# Altium PCB 核心板.PcbDoc (part 2 of 2)
Units mm, origin at the board's own origin, x right, y up, seen from the top; angles counter-clockwise.
Board outline 30 x 30 mm, 4 copper layers (Top Layer, Mid-Layer 1, Internal Plane 2, Bottom Layer); 39 components, 95 nets, 264 pads, 53 vias.
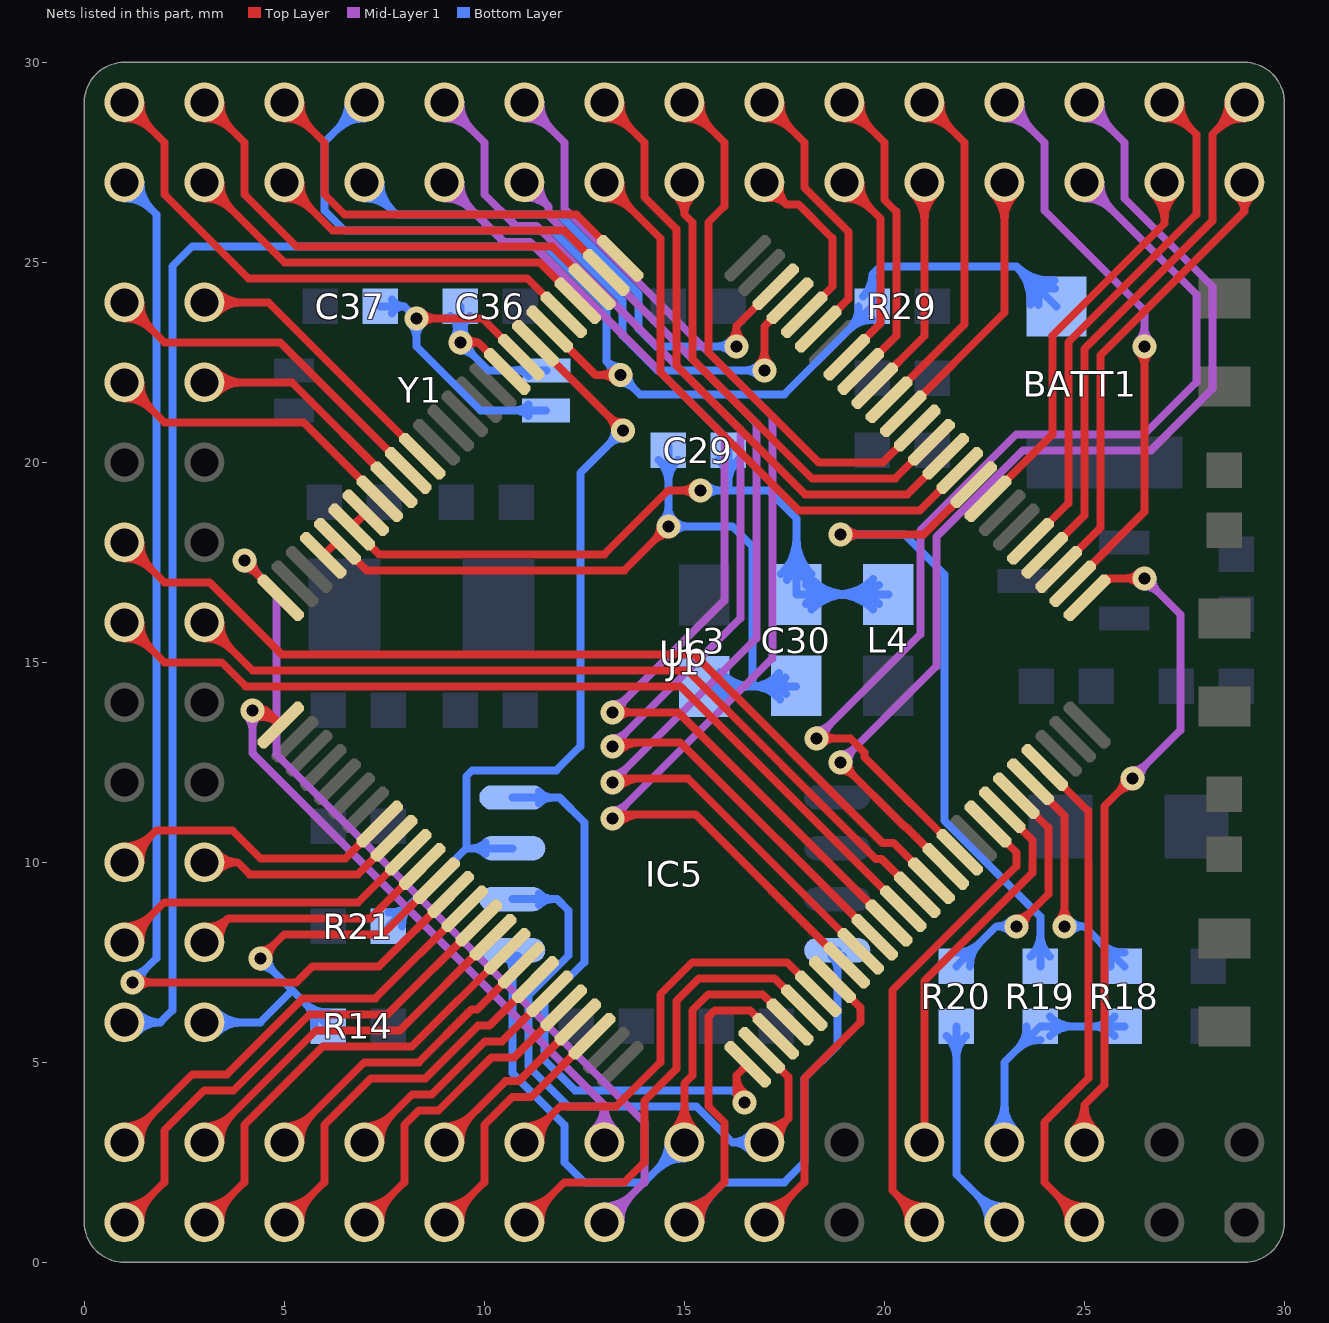
[diagram p4: the nets of this part, all layers, seen from the top]

## Via types
v1: diameter 0.6, hole 0.3, Top Layer to Bottom Layer, tented both sides, 53 vias

## Nets (pads, with @x,y where several pads share a name; then routed paths per layer and width w, separated by ;. In a path a pad name is that pad's centre, name@x,y a point inside that pad or via, vN(x,y) a via of type N, cw(c..) or ccw(c..) an arc to the next point about the centre after c; other vN are vias at no path point) (continued)
PA11: R20.1 U6.70 | length 8.6
  Top Layer w0.2: U6.70@23.299,11.665 24.1,10.864 24.1,9.2 23.4,8.5 v1@23.4,8.4 ; v1@23.3,8.6 ccw(c23.3,9.083) 23.641,8.741 ccw(c23.983,8.4) v1@23.5,8.4
  Bottom Layer w0.2: R20.1@21.8,7.4 22.8,8.4 v1(23.3,8.4) ; R20.1@21.8,7.74 ccw(c21.8,8.561) 22.38,7.98 ccw(c22.961,7.4) R20.1@22.14,7.4 ; v1@23.159,8.259 ccw(c22.817,7.917) 22.817,8.4 ccw(c22.817,8.883) v1@23.159,8.541
PA12: R18.2 U6.71 | length 8.7
  Top Layer w0.2: U6.71@23.653,12.019 24.5,11.172 v1(24.5,8.4) ; v1@24.359,8.541 ccw(c24.017,8.883) 24.5,8.883 ccw(c24.983,8.883) v1@24.641,8.541
  Bottom Layer w0.2: v1(24.5,8.4) 25,8.4 R18.2@26,7.4 ; v1@24.641,8.259 cw(c24.983,7.917) 24.983,8.4 cw(c24.983,8.883) v1@24.641,8.541 ; R18.2@25.66,7.4 ccw(c24.839,7.4) 25.42,7.98 ccw(c26,8.561) R18.2@26,7.74
PA15: J1.74 U6.77 | length 17.3
  Top Layer w0.2: U6.77@24.714,16.968 26.5,18.755 v1(26.5,22.9) ; v1@26.359,22.759 cw(c26.017,22.417) 26.5,22.417 cw(c26.983,22.417) v1@26.641,22.759
  Mid-Layer 1 w0.2: J1.74@23,28.6 cw(c23,27.634) 23.683,28.317 cw(c24.366,29) J1.74@23.4,29 ; J1.74@23,29 24,28 24,26.3 26.5,23.8 v1(26.5,22.9) ; v1@26.359,23.041 ccw(c26.017,23.383) 26.5,23.383 ccw(c26.983,23.383) v1@26.641,23.041
PB0: J1.34 U6.35 | length 9.5
  Top Layer w0.2: J1.34@1,8 2,9 6.846,9 U6.35@8.097,10.251 ; J1.34@1,8.4 ccw(c1,9.366) 1.683,8.683 ccw(c2.366,8) J1.34@1.4,8
PB1: J1.33 U6.36 | length 7.5
  Top Layer w0.2: J1.33@3,8 3.6,8.6 ; J1.33@3.038,8.398 ccw(c3.105,9.095) 3.6,8.6 ; J1.33@3.398,8.038 cw(c4.095,8.105) 3.6,8.6 ; U6.36@8.45,9.897 7.153,8.6 3.6,8.6
PB2: J1.31 R14.2 U6.37 | length 14.5
  Top Layer w0.2: v1(4.4,7.6) 5,8.2 7.46,8.2 U6.37@8.804,9.544 ; v1@4.4,7.8 ccw(c4.4,8.283) 4.741,7.941 ccw(c5.083,7.6) v1@4.6,7.6
  Bottom Layer w0.2: J1.31@3,6 4.4,6 5.2,6.8 ; J1.31@3.283,5.717 cw(c3.966,5.034) 3.966,6 cw(c3.966,6.966) J1.31@3.283,6.283 ; v1@4.4,7.4 cw(c4.4,6.917) 4.741,7.259 cw(c5.083,7.6) v1@4.6,7.6 ; v1(4.4,7.6) 5.2,6.8 ; R14.2@5.76,5.9 ccw(c4.939,5.9) 5.52,6.48 ccw(c6.1,7.061) R14.2@6.1,6.24 ; R14.2@6.1,5.9 5.2,6.8
PB3: J1.73 U6.89 | length 8.4
  Top Layer w0.2: U6.89@20.471,21.211 23,23.74 J1.73@23,27 ; J1.73@22.717,26.717 cw(c22.034,26.034) 23,26.034 cw(c23.966,26.034) J1.73@23.283,26.717
PB4: J1.72 U6.90 | length 10.1
  Top Layer w0.2: U6.90@20.118,21.564 22,23.447 22,28 J1.72@21,29 ; J1.72@21,28.6 cw(c21,27.634) 21.683,28.317 cw(c22.366,29) J1.72@21.4,29
PB5: J1.71 U6.91 | length 7.1
  Top Layer w0.2: U6.91@19.764,21.918 21,23.154 J1.71@21,27 ; J1.71@20.717,26.717 cw(c20.034,26.034) 21,26.034 cw(c21.966,26.034) J1.71@21.283,26.717
PB6: J1.70 U6.92 | length 9.2
  Top Layer w0.2: J1.70@19,28.6 cw(c19,27.634) 19.683,28.317 cw(c20.366,29) J1.70@19.4,29 ; J1.70@19,29 20,28 20,26.566 20.3,26.266 20.3,23.161 U6.92@19.41,22.272
PB7: J1.69 U6.93 | length 6.6
  Top Layer w0.2: J1.69@19,26.6 cw(c19,25.634) 19.683,26.317 cw(c20.366,27) J1.69@19.4,27 ; J1.69@19,27 19.9,26.1 19.9,23.468 U6.93@19.057,22.625
PB8: J1.68 U6.95 | length 8.4
  Top Layer w0.2: J1.68@17,28.6 cw(c17,27.634) 17.683,28.317 cw(c18.366,29) J1.68@17.4,29 ; J1.68@17,29 18,28 18,26.869 19.1,25.769 19.1,24.082 U6.95@18.35,23.332
PB9: J1.67 U6.96 | length 5.5
  Top Layer w0.2: J1.67@17,27 17.549,26.451 17.851,26.451 18.7,25.603 18.7,24.39 U6.96@17.996,23.686 ; J1.67@17.066,26.606 cw(c17.158,26.061) 17.549,26.451 cw(c17.939,26.842) J1.67@17.394,26.934
PB10: J1.22 U6.47 | length 6.1
  Top Layer w0.2: J1.22@9,3 10.534,4.534 10.866,4.534 U6.47@12.339,6.008 ; J1.22@9,3.4 ccw(c9,4.366) 9.683,3.683 ccw(c10.366,3) J1.22@9.4,3
PB11: J1.21 U6.48 | length 8
  Top Layer w0.2: J1.21@9,1 10,2 10,3.434 10.7,4.134 11.173,4.134 U6.48@12.693,5.655 ; J1.21@9,1.4 ccw(c9,2.366) 9.683,1.683 ccw(c10.366,1) J1.21@9.4,1
PC0: J1.49 U6.15 | length 8.6
  Top Layer w0.2: J1.49@3,24 4.601,24 U6.15@8.45,20.15 ; J1.49@3.283,23.717 cw(c3.966,23.034) 3.966,24 cw(c3.966,24.966) J1.49@3.283,24.283
PC1: J1.50 U6.16 | length 10.4
  Top Layer w0.2: J1.50@1,23.6 cw(c1,22.634) 1.683,23.317 cw(c2.366,24) J1.50@1.4,24 ; J1.50@1,24 2,23 4.893,23 U6.16@8.097,19.797
PC2: J1.47 U6.17 | length 7.3
  Top Layer w0.2: J1.47@3,22 5.186,22 U6.17@7.743,19.443 ; J1.47@3.283,21.717 cw(c3.966,21.034) 3.966,22 cw(c3.966,22.966) J1.47@3.283,22.283
PC3: J1.48 U6.18 | length 9.1
  Top Layer w0.2: J1.48@1,21.6 cw(c1,20.634) 1.683,21.317 cw(c2.366,22) J1.48@1.4,22 ; J1.48@1,22 2,21 5.479,21 U6.18@7.39,19.09
PC4: J1.36 U6.33 | length 8.9
  Top Layer w0.2: J1.36@1,10 1.8,10.8 3.7,10.8 4.4,10.1 6.532,10.1 U6.33@7.39,10.958 ; J1.36@1,10.4 ccw(c1,11.366) 1.683,10.683 ccw(c2.366,10) J1.36@1.4,10
PC5: J1.35 U6.34 | length 6.4
  Top Layer w0.2: J1.35@3,10 3.834,10 ; J1.35@3.312,9.75 cw(c3.834,9.33) 3.834,10 ; J1.35@3.312,10.25 ccw(c3.834,10.67) 3.834,10 ; U6.34@7.743,10.604 6.839,9.7 4.134,9.7 3.834,10
PC6: J1.41 U6.63 | length 22.2
  Top Layer w0.2: J1.41@3,15.6 cw(c3,14.634) 3.683,15.317 cw(c4.366,16) J1.41@3.4,16 ; J1.41@3,16 4.2,14.8 15.073,14.8 19.787,10.087 19.928,10.087 U6.63@20.825,9.19
PC7: J1.44 U6.64 | length 25.2
  Top Layer w0.2: J1.44@1,17.6 cw(c1,16.634) 1.683,17.317 cw(c2.366,18) J1.44@1.4,18 ; J1.44@1,18 2,17 3.131,17 4.931,15.2 15.239,15.2 19.952,10.487 20.235,10.487 U6.64@21.178,9.544
PC8: J1.76 U6.65 | length 30.3
  Top Layer w0.2: v1@18.9,12.3 cw(c18.9,11.817) 19.241,12.159 cw(c19.583,12.5) v1@19.1,12.5 ; v1(18.9,12.5) 20.513,10.887 20.542,10.887 U6.65@21.532,9.897
  Mid-Layer 1 w0.2: v1(18.9,12.5) 21.3,14.9 21.3,18.134 23.466,20.3 26.666,20.3 28.2,21.834 28.2,24.4 26,26.6 26,28 J1.76@25,29 ; v1@18.9,12.7 ccw(c18.9,13.183) 19.241,12.841 ccw(c19.583,12.5) v1@19.1,12.5 ; J1.76@25,28.6 cw(c25,27.634) 25.683,28.317 cw(c26.366,29) J1.76@25.4,29
PC9: J1.75 U6.66 | length 28.7
  Top Layer w0.2: v1(18.3,13.1) 19.148,13.1 19.5,12.749 19.5,12.636 U6.66@21.885,10.251 ; v1@18.441,12.959 cw(c18.783,12.617) 18.783,13.1 cw(c18.783,13.583) v1@18.441,13.241
  Mid-Layer 1 w0.2: v1(18.3,13.1) 20.9,15.7 20.9,18.3 23.3,20.7 26.5,20.7 27.8,22 27.8,24.2 J1.75@25,27 ; v1@18.3,13.3 ccw(c18.3,13.783) 18.641,13.441 ccw(c18.983,13.1) v1@18.5,13.1 ; J1.75@25,26.6 cw(c25,25.634) 25.683,26.317 cw(c26.366,27) J1.75@25.4,27
PC10: J1.79 U6.78 | length 12.5
  Top Layer w0.2: U6.78@24.36,17.322 25.4,18.362 25.4,22.669 29,26.269 ; J1.79@28.784,26.663 cw(c28.531,26.269) 29,26.269 ; J1.79@29,27 29,26.269 ; J1.79@29.216,26.663 ccw(c29.469,26.269) 29,26.269
PC11: J1.80 U6.79 | length 14.9
  Top Layer w0.2: U6.79@24.007,17.675 25,18.669 25,22.834 28.2,26.034 28.2,28.2 J1.80@29,29 ; J1.80@28.6,29 cw(c27.634,29) 28.317,28.317 cw(c29,27.634) J1.80@29,28.6
PC12: J1.78 U6.80 | length 14.5
  Top Layer w0.2: U6.80@23.653,18.029 24.6,18.976 24.6,23 27.8,26.2 27.8,28.2 J1.78@27,29 ; J1.78@27,28.6 cw(c27,27.634) 27.683,28.317 cw(c28.366,29) J1.78@27.4,29
PC14: C37.2 U6.8 Y1.2 | length 11.7
  Top Layer w0.2: v1(8.3,23.6) 9.95,23.6 U6.8@10.925,22.625 ; v1@8.441,23.459 cw(c8.783,23.117) 8.783,23.6 cw(c8.783,24.083) v1@8.441,23.741
  Bottom Layer w0.2: C37.2@7.4,23.9 8,23.9 ; C37.2@7.692,23.725 cw(c8,23.541) 8,23.9 ; C37.2@7.692,24.075 ccw(c8,24.259) 8,23.9 ; v1@8.159,23.459 cw(c7.817,23.117) 8.3,23.117 cw(c8.783,23.117) v1@8.441,23.459 ; Y1.2@11.102,21.158 ccw(c10.76,20.817) 10.76,21.3 ccw(c10.76,21.782) Y1.2@11.102,21.441 ; Y1.2@11.543,21.3 9.9,21.3 8.3,22.9 v1(8.3,23.6) 8,23.9
PC15: C36.2 U6.9 Y1.1 | length 10.4
  Top Layer w0.2: v1(9.4,23) 9.843,23 ; v1@9.55,22.868 cw(c9.843,22.609) 9.843,23 ; v1@9.55,23.132 ccw(c9.843,23.391) 9.843,23 ; U6.9@10.572,22.272 9.843,23
  Bottom Layer w0.2: C36.2@9.16,23.66 cw(c8.579,23.079) 9.4,23.079 cw(c10.221,23.079) C36.2@9.64,23.66 ; v1@9.238,23.117 ccw(c8.911,23.351) 9.299,23.455 ; v1@9.259,23.141 ccw(c8.917,23.483) 9.4,23.483 ccw(c9.883,23.483) v1@9.541,23.141 ; v1@9.3,23.173 ccw(c9.094,23.531) 9.492,23.424 ; 9.308,23.424 ccw(c9.706,23.531) v1@9.5,23.173 ; v1@9.4,22.8 cw(c9.4,22.317) 9.741,22.659 cw(c10.083,23) v1@9.6,23 ; C36.2@9.4,23.9 v1(9.4,23) 10.1,22.301 Y1.1@11.553,22.301 ; 9.501,23.455 ccw(c9.889,23.351) v1@9.563,23.117 ; Y1.1@11.112,22.159 ccw(c10.77,21.818) 10.77,22.301 ccw(c10.77,22.783) Y1.1@11.112,22.442
PD2: J1.77 U6.83 | length 11.3
  Top Layer w0.2: U6.83@22.592,19.09 24.2,20.697 24.2,23.166 27,25.966 J1.77@27,27 ; J1.77@26.717,26.717 cw(c26.034,26.034) 27,26.034 cw(c27.966,26.034) J1.77@27.283,26.717
PD4: J1.63 U6.85 | length 16.2
  Top Layer w0.2: J1.63@13,26.6 cw(c13,25.634) 13.683,26.317 cw(c14.366,27) J1.63@13.4,27 ; J1.63@13,27 14.4,25.6 14.4,22.254 17.854,18.8 20.889,18.8 U6.85@21.885,19.797
PD5: J1.64 U6.86 | length 17.3
  Top Layer w0.2: J1.64@13,28.6 cw(c13,27.634) 13.683,28.317 cw(c14.366,29) J1.64@13.4,29 ; J1.64@13,29 14,28 14,26.634 14.8,25.834 14.8,22.42 18.02,19.2 20.581,19.2 U6.86@21.532,20.15
PD6: J1.65 U6.87 | length 13.2
  Top Layer w0.2: J1.65@14.76,26.68 cw(c14.4,26.2) 15,26.2 ; J1.65@15,27 15,26.2 ; J1.65@15.24,26.68 ccw(c15.6,26.2) 15,26.2 ; U6.87@21.178,20.504 20.274,19.6 18.186,19.6 15.2,22.586 15.2,26 15,26.2
PD7: J1.66 U6.88 | length 15.1
  Top Layer w0.2: J1.66@15,28.6 cw(c15,27.634) 15.683,28.317 cw(c16.366,29) J1.66@15.4,29 ; J1.66@15,29 16,28 16,26.4 15.6,26 15.6,22.751 18.351,20 19.967,20 U6.88@20.825,20.857
PD10: J1.13 U6.57 | length 8.9
  Top Layer w0.2: J1.13@17,1 18,2 18,4.6 19.4,6 19.4,6.372 U6.57@18.703,7.069 ; J1.13@17,1.4 ccw(c17,2.366) 17.683,1.683 ccw(c18.366,1) J1.13@17.4,1
PD11: J1.62 U6.58 | length 32.5
  Top Layer w0.2: v1@13.2,11.2 15.279,11.2 U6.58@19.057,7.422 ; v1@13.341,10.959 cw(c13.924,10.376) 13.924,11.2
  Mid-Layer 1 w0.2: J1.62@11,28.6 cw(c11,27.634) 11.683,28.317 cw(c12.366,29) J1.62@11.4,29 ; J1.62@11,29 12,28 12,26.351 17.2,21.151 17.2,15.1 v1(13.2,11.1) ; v1@13.2,11.3 ccw(c13.2,11.783) 13.541,11.441 ccw(c13.883,11.1) v1@13.4,11.1
PD12: J1.61 U6.59 | length 29.5
  Top Layer w0.2: v1@13.2,12.1 15.086,12.1 U6.59@19.41,7.776 ; v1@13.341,11.859 cw(c13.924,11.276) 13.924,12.1
  Mid-Layer 1 w0.2: J1.61@11,27 11.6,26.4 ; J1.61@11.038,26.602 cw(c11.105,25.905) 11.6,26.4 ; J1.61@11.398,26.962 ccw(c12.095,26.895) 11.6,26.4 ; v1(13.2,12) 16.8,15.6 16.8,20.986 11.6,26.186 11.6,26.4 ; v1@13.2,12.2 ccw(c13.2,12.683) 13.541,12.341 ccw(c13.883,12) v1@13.4,12
PD13: J1.60 U6.60 | length 32.3
  Top Layer w0.2: v1@13.2,12.997 14.896,12.997 U6.60@19.764,8.129 ; v1@13.341,12.759 cw(c13.917,12.183) 13.917,12.997
  Mid-Layer 1 w0.2: J1.60@9,28.6 cw(c9,27.634) 9.683,28.317 cw(c10.366,29) J1.60@9.4,29 ; J1.60@9,29 10,28 10,26.7 10.79,25.91 11.31,25.91 16.4,20.82 16.4,16.1 v1(13.2,12.9) ; v1@13.2,13.1 ccw(c13.2,13.583) 13.541,13.241 ccw(c13.883,12.9) v1@13.4,12.9
PD14: J1.59 U6.61 | length 29.8
  Top Layer w0.2: v1(13.2,13.749) 14.852,13.749 U6.61@20.118,8.483 ; v1@13.341,13.607 cw(c13.683,13.266) 13.683,13.749 cw(c13.683,14.231) v1@13.341,13.89
  Mid-Layer 1 w0.2: J1.59@9,26.6 cw(c9,25.634) 9.683,26.317 cw(c10.366,27) J1.59@9.4,27 ; J1.59@9,27 10.49,25.51 11.144,25.51 16,20.654 16,16.549 v1(13.2,13.749) ; v1@13.2,13.949 ccw(c13.2,14.431) 13.541,14.09 ccw(c13.883,13.749) v1@13.4,13.749
PD15: J1.42 U6.62 | length 24
  Top Layer w0.2: J1.42@1,15.6 cw(c1,14.634) 1.683,15.317 cw(c2.366,16) J1.42@1.4,16 ; J1.42@1,16 2,15 3.434,15 4.034,14.4 14.908,14.4 U6.62@20.471,8.837
PE0: J1.58 U6.97 | length 21.3
  Top Layer w0.2: v1@16.859,22.441 ccw(c16.517,22.783) 17,22.783 ccw(c17.483,22.783) v1@17.141,22.441 ; v1(17,22.3) 17,23.397 U6.97@17.643,24.039
  Bottom Layer w0.2: J1.58@6.6,29 cw(c5.634,29) 6.317,28.317 cw(c7,27.634) J1.58@7,28.6 ; J1.58@7,29 6,28 6,26.3 6.5,25.8 11.7,25.8 13.46,24.04 13.46,23.17 14.33,22.3 v1(17,22.3) ; v1@16.859,22.159 ccw(c16.517,21.817) 16.517,22.3 ccw(c16.517,22.783) v1@16.859,22.441
PE1: J1.57 U6.98 | length 16.4
  Top Layer w0.2: v1@16.159,23.041 ccw(c15.817,23.383) 16.3,23.383 ccw(c16.783,23.383) v1@16.441,23.041 ; v1(16.3,22.9) 16.3,23.404 U6.98@17.289,24.393
  Bottom Layer w0.2: J1.57@7,26.6 cw(c7,25.634) 7.683,26.317 cw(c8.366,27) J1.57@7.4,27 ; J1.57@7,27 7.8,26.2 11.866,26.2 13.86,24.206 13.86,23.336 14.296,22.9 v1(16.3,22.9) ; v1@16.159,22.759 ccw(c15.817,22.417) 15.817,22.9 ccw(c15.817,23.383) v1@16.159,23.041
PE2: J1.56 U6.1 | length 12.3
  Top Layer w0.2: J1.56@5,28.6 cw(c5,27.634) 5.683,28.317 cw(c6.366,29) J1.56@5.4,29 ; J1.56@5,29 6,28 6,26.7 6.5,26.2 12.3,26.2 U6.1@13.4,25.1
PE3: J1.55 U6.2 | length 10.5
  Top Layer w0.2: J1.55@5,26.6 cw(c5,25.634) 5.683,26.317 cw(c6.366,27) J1.55@5.4,27 ; J1.55@5,27 6.2,25.8 11.993,25.8 U6.2@13.046,24.746
PE4: J1.54 U6.3 | length 13.9
  Top Layer w0.2: J1.54@3,28.6 cw(c3,27.634) 3.683,28.317 cw(c4.366,29) J1.54@3.4,29 ; J1.54@3,29 4,28 4,26.7 5.3,25.4 11.686,25.4 U6.3@12.693,24.393
PE5: J1.53 U6.4 | length 12.1
  Top Layer w0.2: J1.53@3,26.6 cw(c3,25.634) 3.683,26.317 cw(c4.366,27) J1.53@3.4,27 ; J1.53@3,27 5,25 11.379,25 U6.4@12.339,24.039
PE6: J1.52 U6.5 | length 15.5
  Top Layer w0.2: J1.52@1,28.6 cw(c1,27.634) 1.683,28.317 cw(c2.366,29) J1.52@1.4,29 ; J1.52@1,29 2,28 2,26.7 4.1,24.6 11.072,24.6 U6.5@11.986,23.686
PE7: J1.51 U6.38 | length 32.5
  Top Layer w0.2: v1(1.2,7) 5.303,7 5.703,7.4 7.367,7.4 U6.38@9.164,9.197 ; v1@1.341,6.859 cw(c1.683,6.517) 1.683,7 cw(c1.683,7.483) v1@1.341,7.141
  Bottom Layer w0.2: J1.51@1,26.6 cw(c1,25.634) 1.683,26.317 cw(c2.366,27) J1.51@1.4,27 ; J1.51@1,27 1.8,26.2 1.8,7.6 v1(1.2,7) ; v1@1.2,7.2 ccw(c1.2,7.683) 1.541,7.341 ccw(c1.883,7) v1@1.4,7
PE8: J1.30 U6.39 | length 12.4
  Top Layer w0.2: J1.30@1,3 2.7,4.7 3.569,4.7 5.469,6.6 7.274,6.6 U6.39@9.511,8.837 ; J1.30@1,3.4 ccw(c1,4.366) 1.683,3.683 ccw(c2.366,3) J1.30@1.4,3
PE9: J1.29 U6.40 | length 14.2
  Top Layer w0.2: J1.29@1,1 2,2 2,3.3 3,4.3 3.734,4.3 5.634,6.2 7.581,6.2 U6.40@9.864,8.483 ; J1.29@1,1.4 ccw(c1,2.366) 1.683,1.683 ccw(c2.366,1) J1.29@1.4,1
PE10: J1.28 U6.41 | length 10.9
  Top Layer w0.2: J1.28@3,3 5.8,5.8 7.889,5.8 U6.41@10.218,8.129 ; J1.28@3,3.4 ccw(c3,4.366) 3.683,3.683 ccw(c4.366,3) J1.28@3.4,3
PE11: J1.27 U6.42 | length 12.7
  Top Layer w0.2: J1.27@3,1 4,2 4,3.434 5.966,5.4 8.196,5.4 U6.42@10.572,7.776 ; J1.27@3,1.4 ccw(c3,2.366) 3.683,1.683 ccw(c4.366,1) J1.27@3.4,1
PE12: J1.26 U6.43 | length 9.3
  Top Layer w0.2: J1.26@5,3 7,5 8.361,5 9.681,6.319 9.822,6.319 U6.43@10.925,7.422 ; J1.26@5,3.4 ccw(c5,4.366) 5.683,3.683 ccw(c6.366,3) J1.26@5.4,3
PE13: J1.25 U6.44 | length 11.1
  Top Layer w0.2: J1.25@5,1 6,2 6,3.434 7.166,4.6 8.527,4.6 9.846,5.919 10.129,5.919 U6.44@11.279,7.069 ; J1.25@5,1.4 ccw(c5,2.366) 5.683,1.683 ccw(c6.366,1) J1.25@5.4,1
PE14: J1.24 U6.45 | length 7.7
  Top Layer w0.2: J1.24@7,3 8.2,4.2 8.693,4.2 10.012,5.519 10.436,5.519 U6.45@11.632,6.715 ; J1.24@7,3.4 ccw(c7,4.366) 7.683,3.683 ccw(c8.366,3) J1.24@7.4,3
PE15: J1.23 U6.46 | length 9.6
  Top Layer w0.2: J1.23@7,1 8,2 8,3.434 8.366,3.8 8.858,3.8 10.178,5.119 10.743,5.119 U6.46@11.986,6.362 ; J1.23@7,1.4 ccw(c7,2.366) 7.683,1.683 ccw(c8.366,1) J1.23@7.4,1
RX1: J1.10 U6.69 | length 9.7
  Top Layer w0.2: J1.10@21,3 21,7.034 23.7,9.734 23.7,10.557 U6.69@22.946,11.311
RX2: J1.18 U6.26 | length 19.2
  Top Layer w0.2: v1@4.253,13.607 cw(c4.434,12.952) U6.26@4.915,13.433 4.547,13.8 ; v1@4.373,13.7 cw(c4.547,13.598) 4.547,13.8 ; v1@4.373,13.9 ccw(c4.547,14.002) 4.547,13.8 ; 4.672,13.675 ccw(c4.329,13.333) v1(4.2,13.8) 4.547,13.8
  Mid-Layer 1 w0.2: v1@4.059,13.659 cw(c3.717,13.317) 4.2,13.317 cw(c4.683,13.317) v1@4.341,13.659 ; v1(4.2,13.8) 4.2,12.734 13,3.934 ; J1.18@12.724,3.289 ccw(c12.109,3.934) 13,3.934 ; J1.18@13,3 13,3.934 ; J1.18@13.276,3.289 cw(c13.891,3.934) 13,3.934
RX3: J1.20 U6.56 | length 12.1
  Top Layer w0.2: J1.20@11,3 11.9,3.9 13.3,3.9 14.4,5 14.4,6.7 15.2,7.5 17.565,7.5 U6.56@18.35,6.715 ; J1.20@11,3.4 ccw(c11,4.366) 11.683,3.683 ccw(c12.366,3) J1.20@11.4,3
SPI_FCS: IC5.4 U6.51 | length 16.8
  Top Layer w0.2: 16.3,4.333 ccw(c16.677,4.333) v1(16.5,4) 16.3,4.2 16.3,4.665 ; U6.51@16.582,4.947 16.3,4.665 ; v1@16.594,4.177 cw(c16.854,4.665) 16.3,4.665
  Bottom Layer w0.2: IC5.4@10.7,11.62 11.88,11.62 12.5,11 12.5,7.5 11.5,6.5 11.5,5.066 12.266,4.3 16.2,4.3 v1(16.5,4) ; IC5.4@11.366,11.475 cw(c11.715,11.126) 11.715,11.62 cw(c11.715,12.114) IC5.4@11.366,11.765
SPI_FRST: IC5.3 R21.2 U6.7 | length 23.9
  Top Layer w0.2: U6.7@11.279,22.979 v1(13.462,20.796) ; v1@13.262,20.796 ccw(c12.779,20.796) 13.12,21.137 ccw(c13.462,21.479) v1@13.462,20.996
  Bottom Layer w0.2: R21.2@7.6,8.4 9.55,10.35 ; R21.2@7.6,8.74 ccw(c7.6,9.561) 8.18,8.98 ccw(c8.761,8.4) R21.2@7.94,8.4 ; IC5.3@10.034,10.205 ccw(c9.685,9.856) 9.685,10.35 ccw(c9.685,10.844) IC5.3@10.034,10.495 ; IC5.3@10.7,10.35 9.55,10.35 ; v1@13.262,20.796 cw(c12.779,20.796) 13.12,20.454 cw(c13.462,20.113) v1@13.462,20.596 ; v1(13.462,20.796) 12.4,19.734 12.4,12.9 11.8,12.3 9.7,12.3 9.55,12.15 9.55,10.35
SPI_MISO: IC5.8 J1.15 U6.53 | length 20.8
  Top Layer w0.2: J1.15@15,1 16,2 16,3.5 15.6,3.9 15.6,6.134 15.766,6.3 16.644,6.3 U6.53@17.289,5.655 ; J1.15@15,1.4 ccw(c15,2.366) 15.683,1.683 ccw(c16.366,1) J1.15@15.4,1
  Bottom Layer w0.2: J1.15@15,1 16,2 17.5,2 18,2.5 18,4.6 18.823,5.423 IC5.8@18.823,7.8 ; J1.15@15,1.4 ccw(c15,2.366) 15.683,1.683 ccw(c16.366,1) J1.15@15.4,1 ; IC5.8@18.679,7.655 cw(c18.329,7.306) 18.823,7.306 cw(c19.318,7.306) IC5.8@18.968,7.655
SPI_MOSI: IC5.1 J1.16 U6.54 | length 19.5
  Top Layer w0.2: J1.16@14.717,3.283 ccw(c14.034,3.966) 15,3.966 ccw(c15.966,3.966) J1.16@15.283,3.283 ; J1.16@15,3 15,4.469 15.2,4.669 15.2,6.3 15.6,6.7 16.951,6.7 U6.54@17.643,6.008
  Bottom Layer w0.2: IC5.1@10.555,7.655 cw(c10.206,7.306) 10.7,7.306 cw(c11.194,7.306) IC5.1@10.845,7.655 ; IC5.1@10.7,7.8 10.7,4.734 12,3.434 12,2.5 12.5,2 14,2 J1.16@15,3 ; J1.16@14.6,3 cw(c13.634,3) 14.317,2.317 cw(c15,1.634) J1.16@15,2.6
SPI_SCK: IC5.2 J1.14 U6.52 | length 18.5
  Top Layer w0.2: U6.52@16.936,5.301 17.6,4.637 17.6,3.6 ; J1.14@17,3 17.6,3.6 ; J1.14@17.038,3.398 ccw(c17.105,4.095) 17.6,3.6 ; J1.14@17.398,3.038 cw(c18.095,3.105) 17.6,3.6
  Bottom Layer w0.2: IC5.2@10.7,9.08 11.82,9.08 12.1,8.8 12.1,7.666 11.1,6.666 11.1,4.9 12.1,3.9 15.3,3.9 16.2,3 ; IC5.2@11.366,8.935 cw(c11.715,8.586) 11.715,9.08 cw(c11.715,9.574) IC5.2@11.366,9.225 ; J1.14@16.68,2.76 ccw(c16.2,2.4) 16.2,3 ; J1.14@16.68,3.24 cw(c16.2,3.6) 16.2,3 ; J1.14@17,3 16.2,3
SWDCK: J1.6 U6.76 | length 21.8
  Top Layer w0.2: J1.6@24.724,3.289 ccw(c24.109,3.934) 25,3.934 ; J1.6@25,3 25,3.934 ; U6.76@25.067,16.615 25.553,17.1 v1(26.5,17.1) ; J1.6@25.276,3.289 cw(c25.891,3.934) 25,3.934 ; U6.76@25.527,17.004 cw(c25.76,16.771) 25.76,17.1 ; v1@26,12.1 cw(c25.517,12.1) 25.859,11.759 cw(c26.2,11.417) v1@26.2,11.9 ; v1(26.2,12.1) 25.5,11.4 25.5,4.434 25,3.934 ; v1@26.359,16.959 ccw(c26.017,16.617) 26.017,17.1 ccw(c26.017,17.583) v1@26.359,17.241
  Mid-Layer 1 w0.2: v1(26.2,12.1) 27.4,13.3 27.4,16.2 v1(26.5,17.1) ; v1@26.2,12.3 ccw(c26.2,12.783) 26.541,12.441 ccw(c26.883,12.1) v1@26.4,12.1 ; v1@26.5,16.9 cw(c26.5,16.417) 26.841,16.759 cw(c27.183,17.1) v1@26.7,17.1
SWDIO: J1.5 U6.72 | length 14.2
  Top Layer w0.2: U6.72@24.007,12.372 25.1,11.279 25.1,4.6 24,3.5 24,2 J1.5@25,1 ; J1.5@24.6,1 ccw(c23.634,1) 24.317,1.683 ccw(c25,2.366) J1.5@25,1.4
TX1: J1.9 U6.68 | length 13.4
  Top Layer w0.2: J1.9@20.6,1 ccw(c19.634,1) 20.317,1.683 ccw(c21,2.366) J1.9@21,1.4 ; J1.9@21,1 20.2,1.8 20.2,6.8 23.3,9.9 23.3,10.25 U6.68@22.592,10.958
TX2: J1.17 U6.25 | length 25.5
  Top Layer w0.2: v1@4,17.349 cw(c4,16.912) 4.309,17.221 ; v1(4,17.549) 4,17.529 U6.25@4.915,16.615 ; v1@4.2,17.549 ccw(c4.729,17.549) 4.355,17.175
  Mid-Layer 1 w0.2: v1@4,17.349 cw(c4,16.866) 4.341,17.207 cw(c4.683,17.549) v1@4.2,17.549 ; v1(4,17.549) 4.8,16.749 4.8,12.7 14,3.5 14,2 J1.17@13,1 ; J1.17@13,1.4 ccw(c13,2.366) 13.683,1.683 ccw(c14.366,1) J1.17@13.4,1
TX3: J1.19 U6.55 | length 13.2
  Top Layer w0.2: J1.19@11,1 12,2 13.5,2 14,2.5 14,4.034 14.8,4.834 14.8,6.534 15.366,7.1 17.258,7.1 U6.55@17.996,6.362 ; J1.19@11,1.4 ccw(c11,2.366) 11.683,1.683 ccw(c12.366,1) J1.19@11.4,1
USB_D+: J1.8 R18.1 R19.2 | length 10.8
  Bottom Layer w0.2: J1.8@22.717,3.283 ccw(c22.034,3.966) 23,3.966 ccw(c23.966,3.966) J1.8@23.283,3.283 ; J1.8@23,3 23,5 R19.2@23.9,5.9 R18.1@26,5.9 ; R19.2@23.56,5.9 cw(c22.739,5.9) 23.32,5.32 cw(c23.9,4.739) R19.2@23.9,5.56 ; R19.2@24.14,5.66 cw(c24.721,5.079) 24.721,5.9 cw(c24.721,6.721) R19.2@24.14,6.14 ; R18.1@25.76,5.66 ccw(c25.179,5.079) 25.179,5.9 ccw(c25.179,6.721) R18.1@25.76,6.14
USB_D-: J1.7 R20.2 | length 8.2
  Bottom Layer w0.2: R20.2@21.56,5.66 cw(c20.979,5.079) 21.8,5.079 cw(c22.621,5.079) R20.2@22.04,5.66 ; R20.2@21.8,5.9 21.8,2.2 J1.7@23,1 ; J1.7@22.6,1 ccw(c21.634,1) 22.317,1.683 ccw(c23,2.366) J1.7@23,1.4
USB_EN: R19.1 U6.84 | length 20.5
  Top Layer w0.2: v1(18.9,18.2) 20.996,18.2 U6.84@22.239,19.443 ; v1@19.041,18.059 cw(c19.383,17.717) 19.383,18.2 cw(c19.383,18.683) v1@19.041,18.341
  Bottom Layer w0.2: v1(18.9,18.2) 20.5,18.2 21.5,17.2 21.5,11.049 23.9,8.649 R19.1@23.9,7.4 ; v1@19.041,18.059 cw(c19.383,17.717) 19.383,18.2 cw(c19.383,18.683) v1@19.041,18.341 ; R19.1@23.66,7.64 ccw(c23.079,8.221) 23.9,8.221 ccw(c24.721,8.221) R19.1@24.14,7.64
VBAT: BATT1.1 J1.32 R29.2 U6.6 | length 58.7
  Top Layer w0.2: U6.6@11.632,23.332 12.779,22.186 v1(13.4,22.186) ; v1@13.259,22.044 ccw(c12.917,21.703) 12.917,22.186 ccw(c12.917,22.669) v1@13.259,22.327
  Bottom Layer w0.2: J1.32@1,6 1.9,6 ; J1.32@1.297,5.732 cw(c1.9,5.188) 1.9,6 ; J1.32@1.297,6.268 ccw(c1.9,6.812) 1.9,6 ; v1@13.2,22.186 ccw(c12.722,22.188) 13.06,22.526 ; v1@13.399,22.386 cw(c13.398,22.864) 13.06,22.526 ; v1@13.4,21.986 cw(c13.4,21.503) 13.741,21.844 cw(c14.083,22.186) v1@13.6,22.186 ; R29.2@19.36,23.9 cw(c18.539,23.9) 19.12,23.32 cw(c19.7,22.739) R29.2@19.7,23.56 ; R29.2@19.464,24.145 ccw(c18.929,24.7) 19.7,24.7 ; R29.2@19.936,24.145 cw(c20.471,24.7) 19.7,24.7 ; BATT1.1@23.652,23.95 ccw(c22.442,24.042) 23.3,24.9 ; BATT1.1@23.851,23.934 ccw(c23.014,23.998) 23.608,24.592 ccw(c24.202,25.186) BATT1.1@24.266,24.349 ; BATT1.1@24.25,24.548 cw(c24.158,25.758) 23.3,24.9 ; BATT1.1@24.3,23.9 23.3,24.9 ; 1.9,6 2.2,6.3 2.2,24.9 2.7,25.4 11.534,25.4 13.06,23.874 13.06,22.526 ; 13.06,22.526 v1(13.4,22.186) 13.886,21.7 17.5,21.7 R29.2@19.7,23.9 19.7,24.7 ; 19.7,24.7 19.9,24.9 23.3,24.9
VDDA: C29.2 C30.2 L3.1 U6.21 U6.22 | length 28.7
  Top Layer w0.2: U6.22@5.975,17.675 U6.21@6.329,18.029 7.058,17.3 13.5,17.3 v1(14.6,18.4) ; v1@14.4,18.4 cw(c13.917,18.4) 14.259,18.059 cw(c14.6,17.717) v1@14.6,18.2
  Bottom Layer w0.2: C29.2@14.36,20.06 cw(c13.779,19.479) 14.6,19.479 cw(c15.421,19.479) C29.2@14.84,20.06 ; v1@14.459,18.541 ccw(c14.117,18.883) 14.6,18.883 ccw(c15.083,18.883) 14.741,18.541 ccw(c15.083,18.883) 15.083,18.4 ccw(c15.083,17.917) v1@14.741,18.259 ; C29.2@14.6,20.4 v1(14.6,18.4) 16.2,18.4 16.7,17.9 16.7,14.4 ; L3.1@15.5,14.4 16.7,14.4 ; L3.1@15.749,14.176 cw(c16.251,13.725) 16.251,14.4 cw(c16.251,15.075) L3.1@15.749,14.624 ; L3.1@15.898,14.042 cw(c16.7,13.322) 16.7,14.4 ; L3.1@15.898,14.758 ccw(c16.7,15.478) 16.7,14.4 ; 17.101,14.4 ccw(c17.101,14.94) C30.2@17.532,14.615 ; 17.122,14.4 cw(c17.122,13.859) C30.2@17.541,14.202 ; C30.2@17.372,14.736 cw(c16.7,15.241) 16.7,14.4 ; C30.2@17.386,14.075 ccw(c16.7,13.513) 16.7,14.4 ; C30.2@17.786,14.4 16.7,14.4
VSSA: C29.1 C30.1 L4.1 U6.19 U6.20 | length 30.9
  Top Layer w0.2: U6.19@7.036,18.736 U6.20@6.682,18.382 7.365,17.7 13,17.7 14.6,19.3 v1(15.4,19.3) ; v1@15.259,19.159 ccw(c14.917,18.817) 14.917,19.3 ccw(c14.917,19.783) v1@15.259,19.441
  Bottom Layer w0.2: v1(15.4,19.3) 16.1,19.3 ; v1@15.541,19.159 cw(c15.883,18.817) 15.883,19.3 cw(c15.883,19.783) v1@15.541,19.441 ; C29.1@15.86,20.06 cw(c15.279,19.479) 16.1,19.479 cw(c16.921,19.479) C29.1@16.34,20.06 ; C29.1@16.1,20.4 C29.1@16.1,20.3 16.1,19.3 ; C30.1@17.422,17.205 ccw(c16.508,18.119) 17.8,18.119 ccw(c19.092,18.119) C30.1@18.178,17.205 ; C30.1@17.563,17.064 ccw(c16.991,17.636) 17.8,17.636 ccw(c18.609,17.636) C30.1@18.037,17.064 ; C30.1@18.037,16.463 cw(c18.609,15.891) 18.609,16.7 cw(c18.609,17.509) C30.1@18.037,16.937 ; C30.1@18.178,16.322 cw(c19.092,15.408) 19.092,16.7 cw(c19.092,17.992) C30.1@18.178,17.078 ; L4.1@19.722,16.322 ccw(c18.808,15.408) 18.808,16.7 ccw(c18.808,17.992) L4.1@19.722,17.078 ; L4.1@19.863,16.463 ccw(c19.291,15.891) 19.291,16.7 ccw(c19.291,17.509) L4.1@19.863,16.937 ; L4.1@20.1,16.7 C30.1@17.8,16.7 17.8,18.6 17.1,19.3 16.1,19.3
pads on no net: U6.0 U6.73

## Polygon pours and split planes (outlines as drawn)
+3.3V on Mid-Layer 1 "Bottom Layer-No Net" (solid, remove dead copper, pour order 6): -0.8,30.9 -0.8,-0.7 30.6,-0.7 30.6,25.668 30.6,30.9
GND on Bottom Layer "Bottom Layer-No Net" (solid, remove dead copper, pour order 5): -0.8,30.9 -0.8,-0.7 30.6,-0.7 30.6,25.668 30.6,30.9
GND on Top Layer "Bottom Layer-No Net" (solid, remove dead copper, pour order 4): -0.8,30.9 -0.8,-0.7 30.5,-0.7 30.5,25.668 30.5,30.9
GND on Internal Plane 2 (split plane): 29.125,29.79 29.247,29.761 29.363,29.713 29.47,29.647 29.566,29.566 29.647,29.47 29.713,29.363 29.761,29.247 29.79,29.125 29.799,29.008 29.798,29 29.798,1 29.799,0.992 29.79,0.875 29.761,0.753 29.713,0.637 29.647,0.53 29.566,0.434 29.47,0.353 29.363,0.287 29.247,0.239 29.125,0.21 29.008,0.201 29,0.202 1,0.202 0.992,0.201 0.875,0.21 0.753,0.239 0.637,0.287 0.53,0.353 0.434,0.434 0.353,0.53 0.287,0.637 0.239,0.753 0.21,0.875 0.201,0.992 0.202,1 0.202,29 0.201,29.008 0.21,29.125 0.239,29.247 0.287,29.363 0.353,29.47 0.434,29.566 0.53,29.647 0.637,29.713 0.753,29.761 0.875,29.79 0.992,29.799 1,29.798 29,29.798 29.008,29.799

## Keep-outs
Keep-Out Layer:
  the board outline again, w0.2

## Other copper
Internal Plane 2 (plane layer: these items are gaps in the copper):
  lines w0.4: 0,29 cw(c1,29) 1,30 ; 0,29 0,1 ccw(c1,1) 1,0 ; 0,29 0,29 ; 1,0 29,0 ; 1,0 1,0 ; 1,30 1,30 ; 1,30 29,30 ; 29,0 ccw(c29,1) 30,1 ; 29,0 29,0 ; 29,30 cw(c29,29) 30,29 ; 29,30 29,30 ; 30,1 30,29 ; 30,1 30,1 ; 30,29 30,29

## Silkscreen, mask and mechanical layers (free items; w line width, h text height)
Top Overlay:
  text "一杯红酒" at 18.1,25.9 h3 r315
  text "阿波罗" at 9.3,25.8 h3.2 r225
  text "YWS®" at 24.7,11.4 h3.5 r225
  text "月亮之心" at 3.8,10.2 h3 r315